# Altium PCB Main_board_rev3.PcbDoc
Units mm, origin at the board's own origin, x right, y up, seen from the top; angles counter-clockwise.
Board outline 279.4 x 91.44 mm, 2 copper layers (Top Layer, Bottom Layer); 17 components, 29 nets, 131 pads, 1 vias.
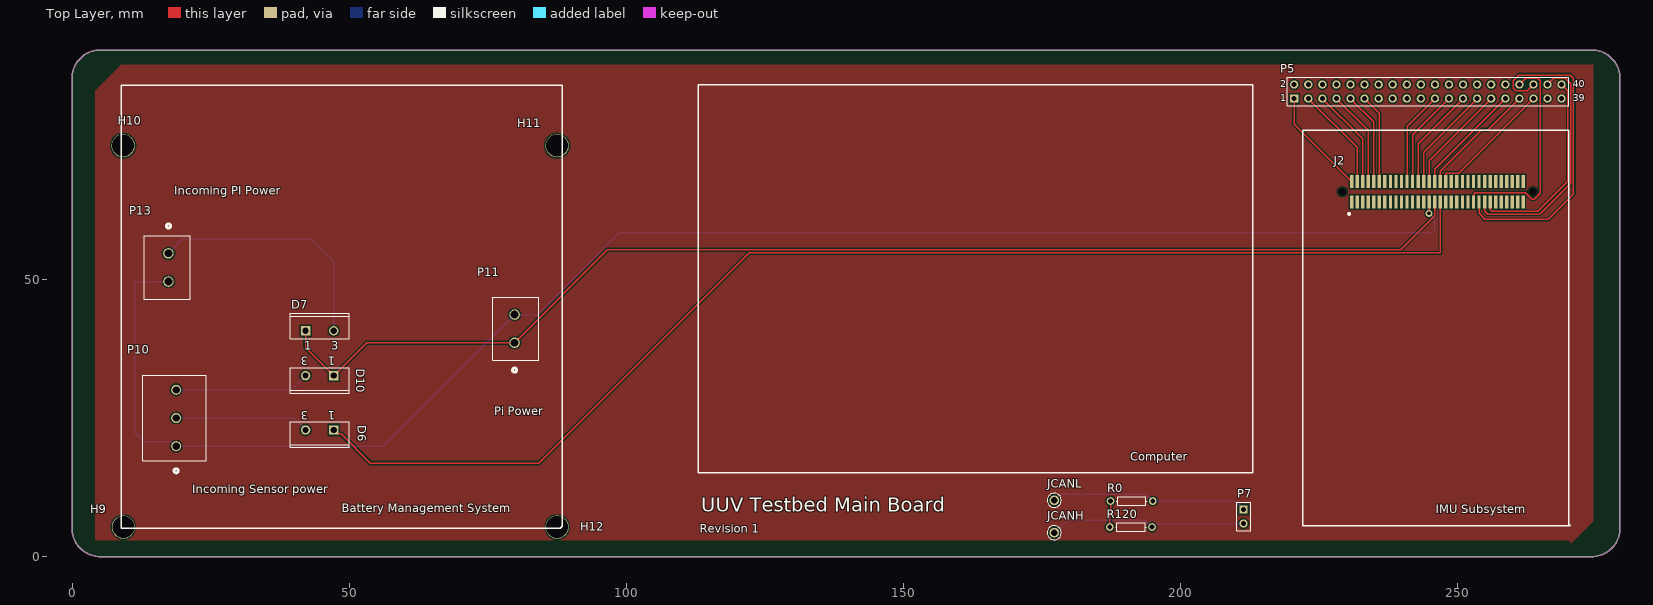
[diagram p0: Top Layer view]
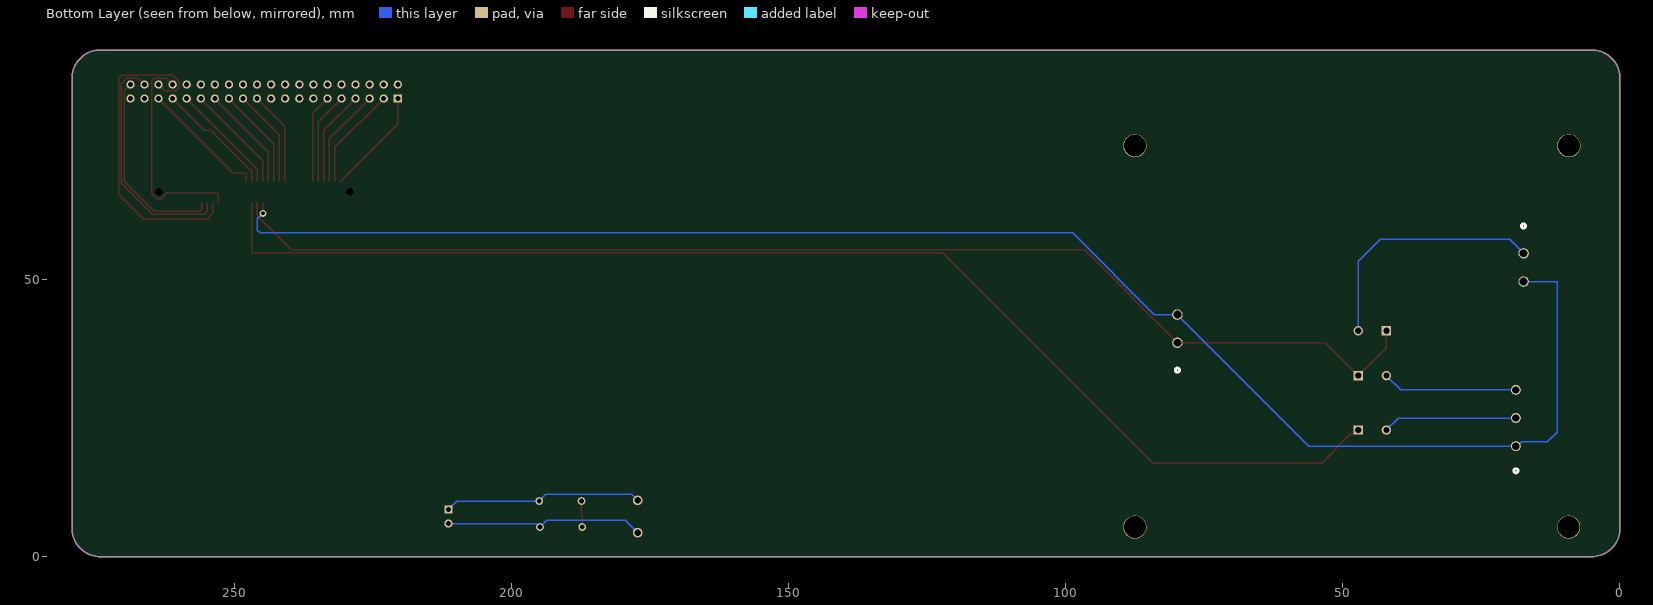
[diagram p1: Bottom Layer view, seen from below]

## Layer stack, top to bottom
Top Solder: solder mask 0.0102, Solder Resist, Dk 3.5
Top Layer: signal copper 0.0356
Dielectric 1: dielectric 0.32, FR-4, Dk 4.8
Bottom Layer: signal copper 0.0356
Bottom Solder: solder mask 0.0102, Solder Resist, Dk 3.5

## Board outline
5.08,0 cw(c5.08,5.08) 0,5.08 0,86.36 cw(c5.08,86.36) 5.08,91.44 274.32,91.44 cw(c274.32,86.36) 279.4,86.36 279.4,5.08 cw(c274.32,5.08) 274.32,0

## Design rules (kind name [scope] priority, off if disabled: settings)
Clearance [All] p1: gap=0.254 ignorepadtopadclearanceinfootprint=FALSE except(0: Arc-Hole Track-Hole SMDPad-Hole THPad-Hole Via-Hole Fill-Hole Poly-Hole Region-Hole Text-Hole)
PolygonConnect [All] p1: connectstyle=Relief reliefconductorwidth=0.254 reliefentries=4 polygonreliefangle="90 Angle" airgapwidth=0.254
RoutingVias [All] p1: holewidth=0.711 width=1.27 viastyle="Through Hole" minholewidth=0.711 minwidth=1.27 maxholewidth=0.711 maxwidth=1.27
SolderMaskExpansion [All] p1: expansion=0.102 istentingtop=FALSE
Width [All] p1: maxlimit=0.254 minlimit=0.254 preferedwidth=0.254
30 further rules are at their usual default settings.

## Classes and differential pairs
component class IMU_board_rev1: B1 J1
component class Main_Board: D6 D7 J2 P11 P13

## Components (designator, comment, footprint, x,y, rotation, side; value= is the part's Value field where it differs from the comment)
D6 "Protection Diode" TO-220AC 44.704,22.86 r180 top
D7 "Protection Diode" TO-220AC 44.704,40.767 r0 top
D10 "Protection Diode" TO-220AC 44.704,32.663 r180 top
H9 "Hole 3mm" "Hole 3mm"#1 9.271,5.334 r0 top
H10 "Hole 3mm" "Hole 3mm"#2 34.036,27.178 r0 top
H11 "Hole 3mm" "Hole 3mm"#3 15.748,10.795 r0 top
H12 "Hole 3mm" "Hole 3mm"#4 34.163,74.422 r0 top
J2 "0714360164" 0714360164 246.467,65.858 r0 top
JCANH "5000" KEYSTONE_5000 177.292,4.318 r90 top (schematic designator JCANH?)
JCANL "5000" KEYSTONE_5000 177.292,10.16 r90 top (schematic designator JCANL?)
P5 "Raspberry Pi" HDR2X20 220.599,82.677 r0 top
P7 "Header 2" HDR1X2 211.455,8.509 r270 top
P10 "1711738" 1711738_PXC 18.796,19.939 r90 top
P11 "1760510000" CONN2_1760510000_WED 79.883,38.608 r90 top
P13 "1760510000" CONN2_1760510000_WED 17.399,54.737 r270 top
R0 "Res1" AXIAL-0.3 191.262,10.033 r0 top value=0
R120 "Res120" AXIAL-0.3 191.135,5.334 r0 top value=120

## Footprints (in the part's own frame and the unit in brackets; to place one, negate y for a bottom-side part, rotate by r counter-clockwise, add the part's x,y. Pads: shape width x height; smd on the part's side, far side on the other; paste and mask are expansions set on the pad)
1711738_PXC [mil]
  round 71 hole 51 mask+0: 1(0,0) 2(200,0) 3(400,0)
  silkscreen extent -190,-214 505,237, body extent 0,0 10,10, height 10
0714360164 [mm]
  rect 0.6x2.3 smd: 1(-15.5,-1.85) 2(-15.5,1.85) 3(-14.5,-1.85) 4(-14.5,1.85) 5(-13.5,-1.85) 6(-13.5,1.85) 7(-12.5,-1.85) 8(-12.5,1.85) 9(-11.5,-1.85) 10(-11.5,1.85) 11(-10.5,-1.85) 12(-10.5,1.85) 13(-9.5,-1.85) 14(-9.5,1.85) 15(-8.5,-1.85) 16(-8.5,1.85) 17(-7.5,-1.85) 18(-7.5,1.85) 19(-6.5,-1.85) 20(-6.5,1.85) 21(-5.5,-1.85) 22(-5.5,1.85) 23(-4.5,-1.85) 24(-4.5,1.85) 25(-3.5,-1.85) 26(-3.5,1.85) 27(-2.5,-1.85) 28(-2.5,1.85) 29(-1.5,-1.85) 30(-1.5,1.85) 31(-0.5,-1.85) 32(-0.5,1.85) 33(0.5,-1.85) 34(0.5,1.85) 35(1.5,-1.85) 36(1.5,1.85) 37(2.5,-1.85) 38(2.5,1.85) 39(3.5,-1.85) 40(3.5,1.85) 41(4.5,-1.85) 42(4.5,1.85) 43(5.5,-1.85) 44(5.5,1.85) 45(6.5,-1.85) 46(6.5,1.85) 47(7.5,-1.85) 48(7.5,1.85) 49(8.5,-1.85) 50(8.5,1.85) 51(9.5,-1.85) 52(9.5,1.85) 53(10.5,-1.85) 54(10.5,1.85) 55(11.5,-1.85) 56(11.5,1.85) 57(12.5,-1.85) 58(12.5,1.85) 59(13.5,-1.85) 60(13.5,1.85) 61(14.5,-1.85) 62(14.5,1.85) 63(15.5,-1.85) 64(15.5,1.85)
  round 0.715 hole 1.43 unplated: MH1(-17.2,0) MH2(17.2,0)
  silkscreen extent -16,-4.05 -15.9,-3.95
AXIAL-0.3 [mm] "Axial Device, Thru-Hole; 2 Leads; 0.3 in Pin Spacing"
  round 1.4 hole 0.85: 1(-3.81,0) 2(3.81,0)
  silkscreen extent -2.77,-0.76 2.77,0.76
CONN2_1760510000_WED [mil]
  round 75 hole 55 mask+0: 1(0,0) 2(200,0)
  silkscreen extent -209,-170 324,155, body extent 0,0 10,10, height 10
HDR1X2 [mm] "Connector; Header; 2 Position"
  rect 1.5x1.5 hole 0.9: 1(0,0)
  round 1.5 hole 0.9: 2(2.54,0)
  silkscreen extent -1.27,-1.27 3.81,1.27
HDR2X20 [mm] "Connector; Header; 20x2 Position"
  rect 1.5x1.5 hole 0.9: 1(0,0)
  round 1.5 hole 0.9: 2(0,2.54) 3(2.54,0) 4(2.54,2.54) 5(5.08,0) 6(5.08,2.54) 7(7.62,0) 8(7.62,2.54) 9(10.16,0) 10(10.16,2.54) 11(12.7,0) 12(12.7,2.54) 13(15.24,0) 14(15.24,2.54) 15(17.78,0) 16(17.78,2.54) 17(20.32,0) 18(20.32,2.54) 19(22.86,0) 20(22.86,2.54) 21(25.4,0) 22(25.4,2.54) 23(27.94,0) 24(27.94,2.54) 25(30.48,0) 26(30.48,2.54) 27(33.02,0) 28(33.02,2.54) 29(35.56,0) 30(35.56,2.54) 31(38.1,0) 32(38.1,2.54) 33(40.64,0) 34(40.64,2.54) 35(43.18,0) 36(43.18,2.54) 37(45.72,0) 38(45.72,2.54) 39(48.26,0) 40(48.26,2.54)
  silkscreen extent -1.27,-1.27 49.53,3.81
"Hole 3mm"#1 [mil]
  round 165 hole 156: 1(0,0)
"Hole 3mm"#2 [mil]
  round 165 hole 156: 1(-977.4,1850)
"Hole 3mm"#3 [mil]
  round 165 hole 156: 1(2826.85,2495)
"Hole 3mm"#4 [mil]
  round 165 hole 156: 1(2101.85,-2720)
KEYSTONE_5000 [mm]
  round 1.755 hole 1.17: 1(0,0)
  silkscreen extent -1.27,-1.27 1.27,1.27
TO-220AC [mm] "TO, Thru-Hole, Vertical, Heatsink Mounted; 3 In-Line Leads (1 Absent); Pitch 2.54 mm"
  rect 1.7x1.7 hole 1.1: 1(-2.54,0)
  round 1.7 hole 1.1: 3(2.54,0)
  silkscreen extent -5.3,-1.45 5.3,3.15

## Part data
D6 D7 D10: library part "Diode 10TQ035", "Schottky Rectifier", ComponentLink1Description="Manufacturer Link", ComponentLink1URL=http://www.irf.com/, ComponentLink2Description=Datasheet, ComponentLink2URL=http://www.irf.com/product-info/datasheets/data/10tq.pdf, DatasheetVersion=PD-2.057B, LatestRevisionDate=17-Jul-2002, LatestRevisionNote="Re-released for DXP Platform.", Note="Terminal 2 is the TAB and is electrically connected to the cathode", PackageDescription="TO, Thru-Hole, Vertical, Heatsink Mounted; 3 In-Line Leads (1 Absent); Pitch 2.54 mm", PackageReference=TO-220AC, PackageVersion=Feb-1998, Published=8-Jun-2000, Publisher="Altium Limited"
J2: "Board to Board & Mezzanine Connectors 1.00MM PLG 02X32P VT SMT", Manufacturer_Name=Molex, Mouser Part Number=N/A, Arrow Part Number=0714360164, Arrow Price/Stock=https://www.arrow.com/en/products/0714360164/molex, Datasheet Link=https://www.molex.com/pdm_docs/sd/714360164_sd.pdf, Geometry.Height=7.48mm, Manufacturer_Part_Number=0714360164, Mouser Price/Stock=https://www.mouser.com/Search/Refine.aspx?Keyword=N%2FA
JCANH JCANL: Package="Custom Package Ohmite", Availability=Good, MF=Keystone, MP=5000, Price=None, Purchase-URL=https://pricing.snapeda.com/search/part/5000/?ref=eda, SnapEDA_Link=https://www.snapeda.com/parts/5000/Keystone/view-part/883846/?ref=snap
P5: library part "Header 20X2", "Header, 20-Pin, Dual row", LatestRevisionDate=17-Jul-2002, LatestRevisionNote="Re-released for DXP Platform.", Publisher="Altium Limited"
P7: "Header, 2-Pin", LatestRevisionDate=17-Jul-2002, LatestRevisionNote="Re-released for DXP Platform.", Publisher="Altium Limited"
P10: "No Description Available", Mfr_Name="Phoenix Contact", Copyright="Copyright (C) 2022 Ultra Librarian. All rights reserved.", Digi-Key_Part_Number_1=277-1028-ND, Manufacturer_Part_Number=1711738, RefDes=RefDes, Type=DEV
P11 P13: "No Description Available", Mfr_Name=Weidmuller, Copyright="Copyright (C) 2022 Ultra Librarian. All rights reserved.", Digi-Key_Part_Number_1=281-1882-ND, Manufacturer_Part_Number=1760510000, RefDes=RefDes, Type=DEV
R0: "Resistor", LatestRevisionDate=17-Jul-2002, LatestRevisionNote="Re-released for DXP Platform.", PackageDescription="Axial Device, Thru-Hole; 2 Leads; 0.3 in Pin Spacing", PackageReference=AXIAL-0.3, Published=8-Jun-2000, Publisher="Altium Limited"
R120: library part Res1, "Resistor", LatestRevisionDate=17-Jul-2002, LatestRevisionNote="Re-released for DXP Platform.", PackageDescription="Axial Device, Thru-Hole; 2 Leads; 0.3 in Pin Spacing", PackageReference=AXIAL-0.3, Published=8-Jun-2000, Publisher="Altium Limited"

## Via types
v1: diameter 1.27, hole 0.711, Top Layer to Bottom Layer, 1 vias

## Nets (pads, with @x,y where several pads share a name; then routed paths per layer and width w, separated by ;. In a path a pad name is that pad's centre, name@x,y a point inside that pad or via, vN(x,y) a via of type N, cw(c..) or ccw(c..) an arc to the next point about the centre after c; other vN are vias at no path point)
"3.3 V": D6.1 J2.33 | length 227.1
  Top Layer w0.254: D6.1 47.967,22.137 48.602,22.137 53.848,16.891 84.277,16.891 122.25,54.864 246.967,54.867 J2.33
3.3V: 
"5 V": D7.1 D10.1 J2.31 P11.1 | length 224.4
  Top Layer w0.254: D7.1 42.164,37.743 D10.1 53.189,38.608 P11.1 96.65,55.375 239.803,55.375 245.983,61.555 245.983,62.397 245.967,62.413 J2.31 J2.31@246.172,62.958
+5: 
GND: J2.29 P10.1 P11.2 P13.2 | length 290.5
  Top Layer w0.254: v1(244.967,61.976) J2.29
  Bottom Layer w0.254: P13.2 11.452,49.657 11.303,49.508 11.303,22.479 13.081,20.701 17.744,20.701 18.506,19.939 P10.1 56.134,19.939 P11.2 84.074,43.688 98.806,58.42 245.44,58.42 245.948,58.928 245.948,60.995 v1(244.967,61.976)
NetD6_3: D6.3 P10.2 | length 24.3
  Bottom Layer w0.254: P10.2 40.005,25.019 D6.3
NetD7_3: D7.3 P13.1 | length 45.1
  Bottom Layer w0.254: P13.1 19.939,57.277 43.307,57.277 47.244,53.34 D7.3
NetD10_3: D10.3 P10.3 | length 24.4
  Bottom Layer w0.254: P10.3 39.6,30.099 D10.3
NetJ2_2: J2.2 P5.1 | length 19.3
  Top Layer w0.254: P5.1 220.599,78.076 J2.2
NetJ2_4: J2.4 P5.3 | length 18.6
  Top Layer w0.254: P5.3 231.967,73.849 J2.4
NetJ2_6: J2.6 P5.5 | length 18
  Top Layer w0.254: P5.5 232.967,75.389 J2.6
NetJ2_8: J2.8 P5.7 | length 17.3
  Top Layer w0.254: P5.7 233.967,76.929 J2.8
NetJ2_10: J2.10 P5.9 | length 16.7
  Top Layer w0.254: P5.9 234.967,78.469 J2.10
NetJ2_12: J2.12 P5.11 | length 16.1
  Top Layer w0.254: P5.11 235.967,80.009 J2.12
NetJ2_22: J2.22 P5.21 | length 17.1
  Top Layer w0.254: J2.22 240.967,77.645 P5.21
NetJ2_24: J2.24 P5.23 | length 17.7
  Top Layer w0.254: J2.24 241.967,76.105 P5.23
NetJ2_26: J2.26 P5.25 | length 18.3
  Top Layer w0.254: J2.26 242.967,74.565 P5.25
NetJ2_28: J2.28 P5.27 | length 19
  Top Layer w0.254: J2.28 243.967,73.025 P5.27
NetJ2_30: J2.30 P5.29 | length 19.6
  Top Layer w0.254: J2.30 244.967,71.485 P5.29
NetJ2_32: J2.32 P5.31 | length 20.2
  Top Layer w0.254: J2.32 245.967,69.945 P5.31
NetJ2_34: J2.34 P5.33 | length 21.6
  Top Layer w0.254: J2.34 246.967,69.571 254.384,76.987 255.549,76.987 P5.33
NetJ2_36: J2.36 P5.35 | length 22.9
  Top Layer w0.254: J2.36 247.967,69.24 250.342,69.24 P5.35
NetJ2_45: J2.45 P5.34 | length 39.2
  Top Layer w0.254: J2.45 252.967,65.388 253.238,65.659 262.316,65.659 263.459,64.516 263.967,64.516 265.049,65.598 265.049,85.852 264.541,86.36 262.382,86.36 P5.34
NetJ2_47: J2.47 P5.36 | length 59.6
  Top Layer w0.254: J2.47 253.967,61.976 255.033,60.91 266.472,60.91 271.006,65.444 271.006,86.375 270.462,86.919 261.112,86.919 260.096,85.903 260.096,84.582 260.604,84.074 262.636,84.074 P5.36
NetJ2_49: J2.49 P5.38 | length 42.7
  Top Layer w0.254: J2.49 254.967,62.381 255.524,61.824 264.897,61.824 270.498,67.425 270.498,85.344 269.482,86.36 267.462,86.36 P5.38
NetJ2_51: J2.51 P5.40 | length 35.7
  Top Layer w0.254: J2.51 255.967,62.651 256.286,62.332 264.566,62.332 269.99,67.755 269.99,84.086 P5.40
NetJCANH?_1: JCANH.1 P7.2 R120.2 | length 35.8
  Bottom Layer w0.254: JCANH.1 179.502,6.528 193.751,6.528 R120.2 195.58,5.969 P7.2
NetJCANL?_1: JCANL.1 P7.1 R0.2 | length 35.7
  Bottom Layer w0.254: JCANL.1 178.359,11.227 193.878,11.227 R0.2 209.931,10.033 P7.1
NetR0_1: R0.1 R120.1 | length 4.8
  Top Layer w0.254: R120.1 187.325,7.62 187.452,7.747 R0.1
pads on no net: H9.1 H10.1 H11.1 H12.1 J2.1 J2.3 J2.5 J2.7 J2.9 J2.11 J2.13 J2.14 J2.15 J2.16 J2.17 J2.18 J2.19 J2.20 J2.21 J2.23 J2.25 J2.27 J2.35 J2.37 J2.38 J2.39 J2.40 J2.41 J2.42 J2.43 J2.44 J2.46 J2.48 J2.50 J2.52 J2.53 J2.54 J2.55 J2.56 J2.57 J2.58 J2.59 J2.60 J2.61 J2.62 J2.63 J2.64 J2.MH1 J2.MH2 P5.2 P5.4 P5.6 P5.8 P5.10 P5.12 P5.13 P5.14 P5.15 P5.16 P5.17 P5.18 P5.19 P5.20 P5.22 P5.24 P5.26 P5.28 P5.30 P5.32 P5.37 P5.39

## Polygon pours and split planes (outlines as drawn)
GND on Top Layer "GND_L01_P000" (solid, pour order 0): 4.191,84.074 8.89,88.773 274.574,88.773 274.574,6.35 270.637,2.413 270.129,2.921 4.191,2.921

## Keep-outs
Keep-Out Layer:
  the board outline again, w0.254

## Silkscreen, mask and mechanical layers (free items; w line width, h text height)
Top Overlay:
  lines w0.254: 8.89,5.08 8.89,84.963 9.017,85.09 88.519,85.09 88.519,5.461 88.138,5.08 8.89,5.08 ; 113.03,15.113 113.03,85.217 213.106,85.217 213.106,15.113 113.03,15.113 ; 222.123,5.588 270.383,5.588 270.129,5.842 270.129,76.962 222.123,76.962 222.123,5.588
  text "Incoming PI Power" at 18.415,65.278 h1.52
  text "Pi Power" at 76.2,25.527 h1.52
  text "Computer" at 191.008,17.272 h1.52
  text "Incoming Sensor power" at 21.717,11.43 h1.52
  text "UUV Testbed Main Board" at 113.538,8.128 h2.54
  text "Battery Management System" at 48.641,8.001 h1.52
  text "IMU Subsystem" at 246.126,7.874 h1.52
  text "Revision 1" at 113.284,4.318 h1.52
Mechanical 1:
  the board outline again, w0.254

## Text inside footprints (layer, text, board x,y; h text height)
D6: Top Overlay "1" at 47.494,26.285 h1.5 r180; Top Overlay "3" at 42.664,26.285 h1.5 r180
D7: Top Overlay "1" at 41.914,37.342 h1.5; Top Overlay "3" at 46.744,37.342 h1.5
D10: Top Overlay "3" at 42.664,36.089 h1.5 r180; Top Overlay "1" at 47.494,36.089 h1.5 r180
P5: Top Overlay "1" at 218.059,82.169 h1.27; Top Overlay "2" at 218.059,84.709 h1.27; Top Overlay "40" at 270.891,84.709 h1.27; Top Overlay "39" at 270.891,82.169 h1.27